# EAGLE board ScanMasterVCI (EAGLE 8.4.3)
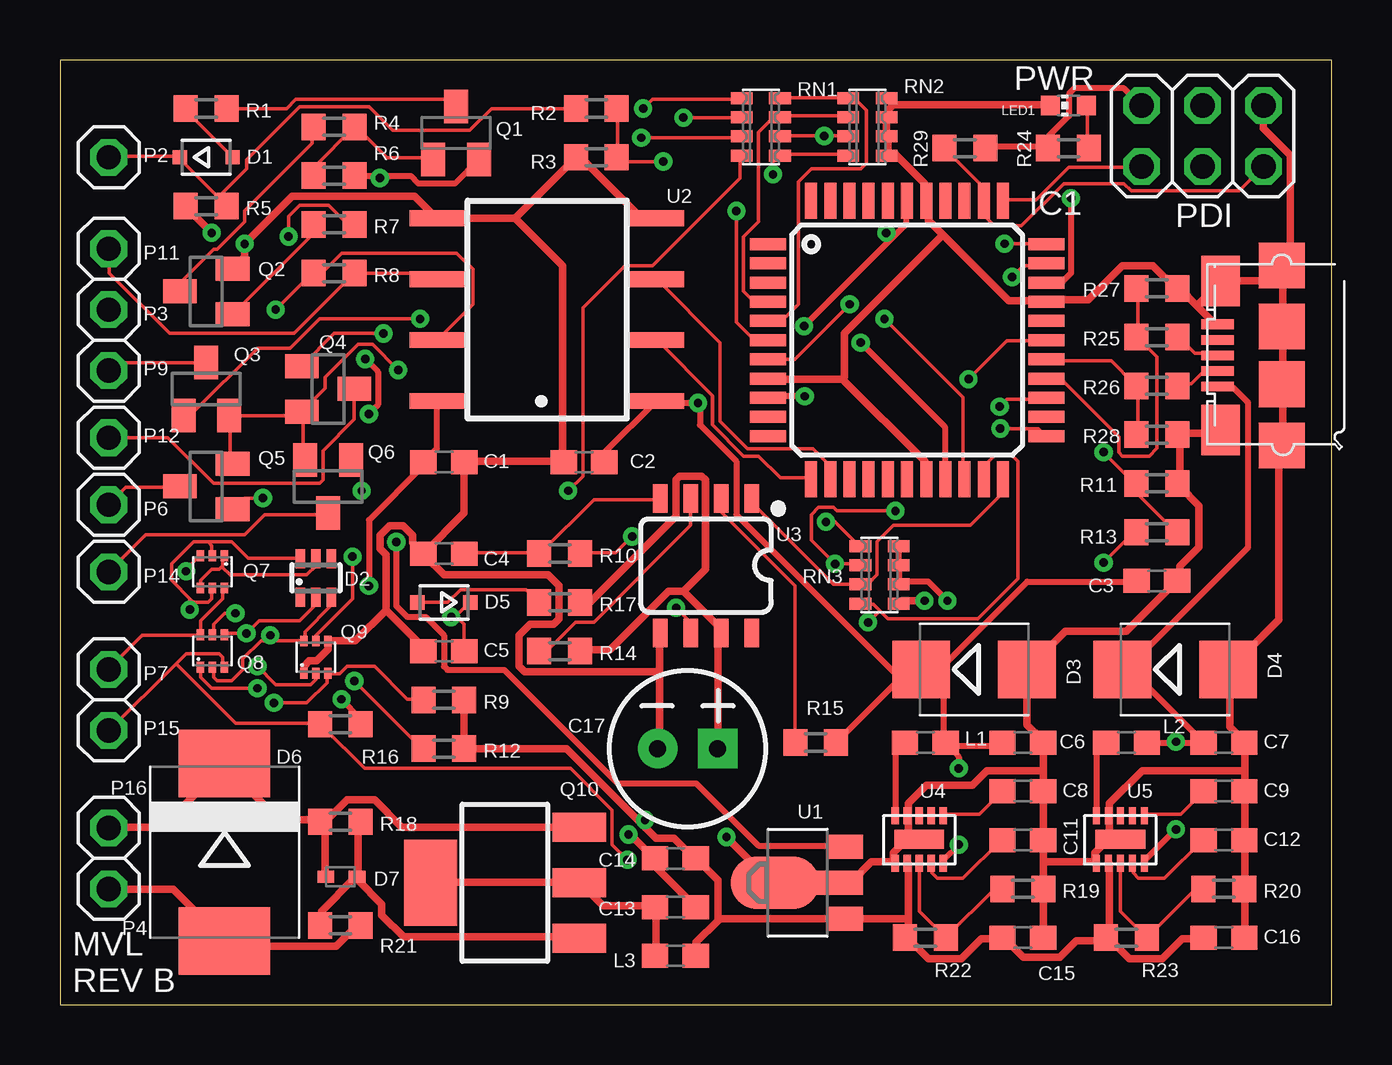
[diagram p0: board, top side]
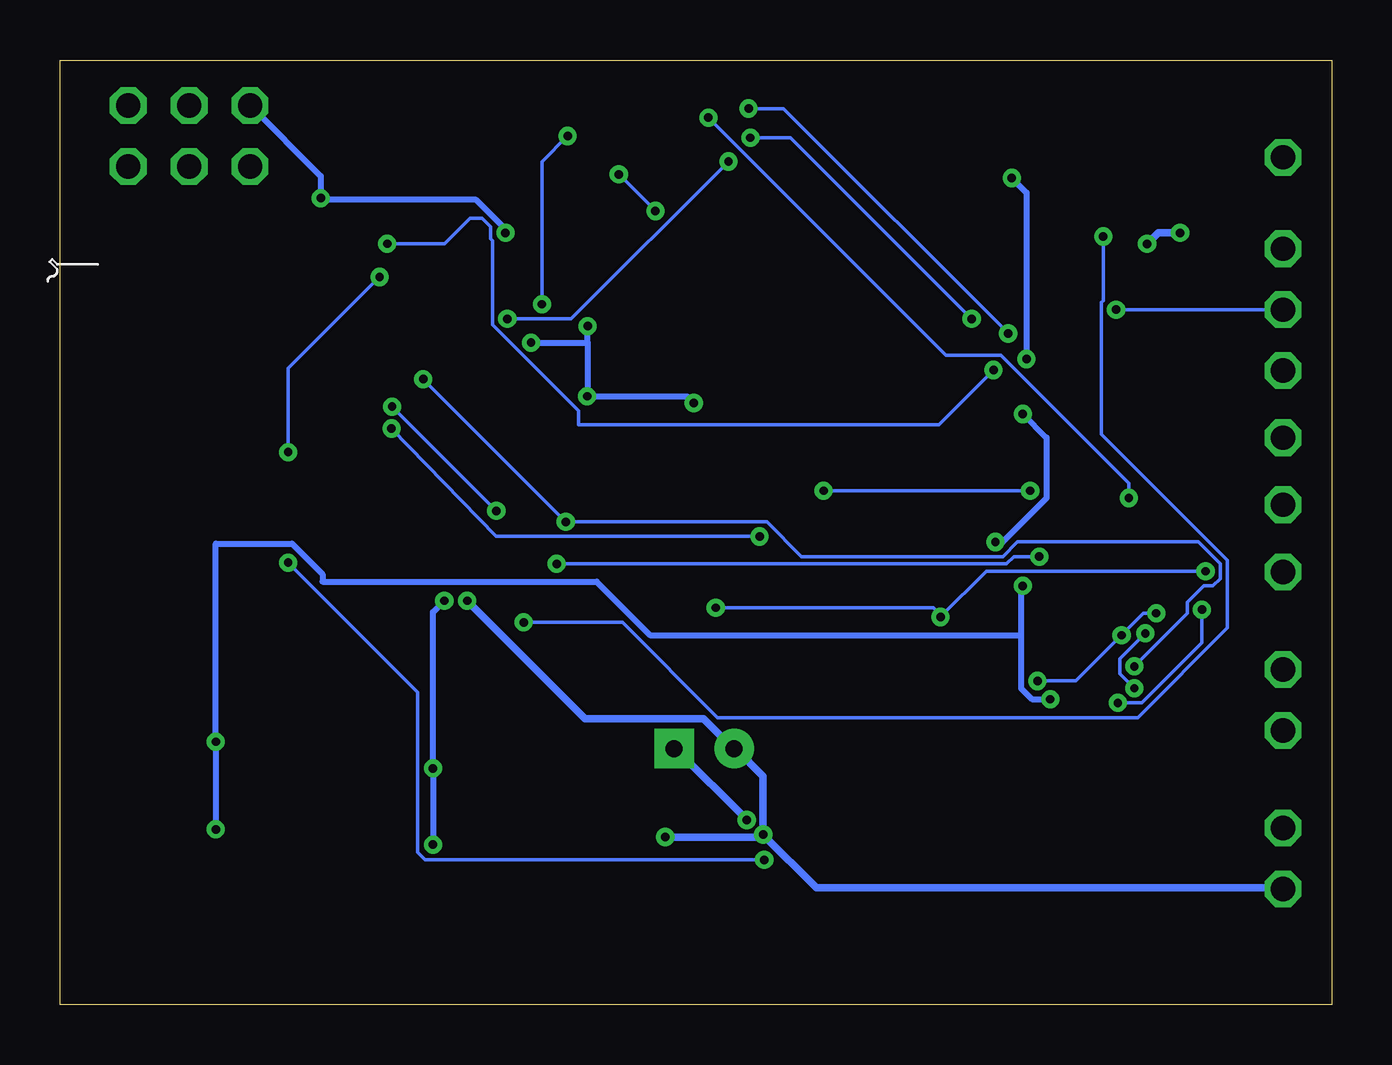
[diagram p1: board, bottom side, seen from below]

Size 53.01 x 39.36 mm. Coordinates in mm from the lower left corner, seen from the top.
Outline: 0,0 53.01,0 53.01,39.36 0,39.36 0,0
Copper layers (1*16): Top 0.035mm / dielectric 1.5mm / Bottom 0.035mm
Design rules "default": minimum track width 6mil, minimum drill 0.35mm, track to track 6mil, track to pad 6mil, pad to pad 6mil, via to via 6mil, smd to smd 6mil, copper to edge 40mil, drill to drill 6mil, minimum pad ring 10mil, minimum via ring 8mil, stop-mask expansion 4mil, vias tented up to drill 0mil, thermal gap 10mil
Net classes: 0 default: width 0.152 mm, drill 0.305 mm, clearance 0.152 mm; 1 +12v: width 0.305 mm, drill 0.305 mm, clearance 0.152 mm; 2 +3.3v: width 0.254 mm, drill 0.305 mm, clearance 0.152 mm; 3 +5v: width 0.254 mm, drill 0.305 mm, clearance 0.152 mm

## Footprints (pad centres in the part's own frame; a part is rotated, then mirrored left to right if it is on the bottom)
C0603 = smd 1.1 x 1: 1 -0.85,0; 2 0.85,0
CPOL-RADIAL-2.5MM-6.5MM = drill 0.7 pad 1.651 square: 1 1.25,0 | drill 0.7 pad 1.651: 2 -1.25,0
SOD323-R = smd 0.6 x 0.6: A 1.1,0; C -1.1,0
SOT363 = smd 0.4 x 0.8: 1 -0.65,-0.8; 2 0,-0.8; 3 0.65,-0.8; 4 0.65,0.8; 5 0,0.8; 6 -0.65,0.8
SMB = smd 2.4 x 2.4: A 2.2,0; C -2.2,0
SMC = smd 2.8 x 3.8: A 3.7,0; C -3.7,0
SOD523 = smd 0.7 x 0.5: A 0.7,0; C -0.6,0
TQFP44 = smd 1.5 x 0.5: 1 -5.8,4; 2 -5.8,3.2; 3 -5.8,2.4; 4 -5.8,1.6; 5 -5.8,0.8; 6 -5.8,0; 7 -5.8,-0.8; 8 -5.8,-1.6; 9 -5.8,-2.4; 10 -5.8,-3.2; 11 -5.8,-4; 23 5.8,-4; 24 5.8,-3.2; 25 5.8,-2.4; 26 5.8,-1.6; 27 5.8,-0.8; 28 5.8,0; 29 5.8,0.8; 30 5.8,1.6; 31 5.8,2.4; 32 5.8,3.2; 33 5.8,4 | smd 0.5 x 1.5: 12 -4,-5.8; 13 -3.2,-5.8; 14 -2.4,-5.8; 15 -1.6,-5.8; 16 -0.8,-5.8; 17 0,-5.8; 18 0.8,-5.8; 19 1.6,-5.8; 20 2.4,-5.8; 21 3.2,-5.8; 22 4,-5.8; 34 4,5.8; 35 3.2,5.8; 36 2.4,5.8; 37 1.6,5.8; 38 0.8,5.8; 39 0,5.8; 40 -0.8,5.8; 41 -1.6,5.8; 42 -2.4,5.8; 43 -3.2,5.8; 44 -4,5.8
L0603 = smd 1.1 x 1: 1 -0.85,0; 2 0.85,0
CHIP-LED0603 = smd 0.8 x 0.8: A 0,-0.75; C 0,0.75
1X01 = drill 1.016 octagon: 1 0,0
2X03 = drill 1.016 octagon: 1 -2.54,-1.27; 2 -2.54,1.27; 3 0,-1.27; 4 0,1.27; 5 2.54,-1.27; 6 2.54,1.27
SOT23-BEC = smd 1 x 1.4: B -0.95,-1.1; C 0,1.1; E 0.95,-1.1
SOT23 = smd 1 x 1.4: 1 -0.95,-1.1; 2 0.95,-1.1; 3 0,1.1
SOT563 = smd 0.3 x 0.45: 1 -0.5,-0.675; 2 0,-0.675; 3 0.5,-0.675; 4 0.5,0.675; 5 0,0.675; 6 -0.5,0.675
SOT223 = smd 1.219 x 2.235: 1 -2.311,-3.099; 2 0,-3.099; 3 2.311,-3.099 | smd 3.6 x 2.2: 4 0,3.099
R0603 = smd 1 x 1.1: 1 -0.85,0; 2 0.85,0
CTS742C083 = smd 0.5 x 0.9: 1 -1.2,-0.8; 2 -0.4,-0.8; 3 0.4,-0.8; 4 1.2,-0.8; 5 1.2,0.8; 6 0.4,0.8; 7 -0.4,0.8; 8 -1.2,0.8
SOT89 = smd 1 x 1.5: 1 -1.499,-1.981; 3 1.499,-1.981 | smd 1 x 2: 2 0,-1.727 | smd 2.2 x 3.7: 2@1 0,0.94
SOP08 = smd 0.65 x 2.35: 1 -3.81,-6.3; 2 -1.27,-6.3; 3 1.27,-6.3; 4 3.81,-6.3; 5 3.81,2.8; 6 1.27,2.8; 7 -1.27,2.8; 8 -3.81,2.8
SO08 = smd 0.6 x 1.2: 1 -1.905,-2.8; 2 -0.635,-2.8; 3 0.635,-2.8; 4 1.905,-2.8; 5 1.905,2.8; 6 0.635,2.8; 7 -0.635,2.8; 8 -1.905,2.8
TDFN-10-EP = smd 0.7 x 0.3: 1 -1.475,1; 2 -1.475,0.5; 3 -1.475,0; 4 -1.475,-0.5; 5 -1.475,-1; 6 0.505,-1; 7 0.505,-0.5; 8 0.505,0; 9 0.505,0.5; 10 0.505,1 | smd 0.8 x 2.08: EPAD -0.48,0
10118192 = smd 1.35 x 0.4: 1 2.675,1.3; 2 2.675,0.65; 3 2.675,0; 4 2.675,-0.65; 5 2.675,-1.3 | smd 1.9 x 1.9: M1 0,-3.75; M2 0,3.75; M5 0,1.2; M6 0,-1.2 | smd 1.6 x 2.1: M3 2.55,3.1; M4 2.55,-3.1

## Placement (x,y rotation side)
C1  0.1uF  [C0603]  16,22.61 0 top
C2  0.1uF  [C0603]  21.84,22.61 180 top
C3  0.1uF  [C0603]  45.72,17.65 0 top
C4  220pF  [C0603]  16,18.8 180 top
C5  220pF  [C0603]  16,14.73 180 top
C6  22uF  [C0603]  40.13,10.92 0 top
C7  22uF  [C0603]  48.51,10.92 0 top
C8  3300pF  [C0603]  40.13,8.89 0 top
C9  3300pF  [C0603]  48.51,8.89 0 top
C11  1uF  [C0603]  40.13,6.86 0 top
C12  1uF  [C0603]  48.51,6.86 0 top
C13  0.1uF 25V  [C0603]  25.65,4.06 0 top
C14  330pF 16V  [C0603]  25.65,6.1 180 top
C15  2.2uF  [C0603]  40.13,2.79 0 top
C16  2.2uF  [C0603]  48.51,2.79 0 top
C17  100uF 25V  [CPOL-RADIAL-2.5MM-6.5MM]  26.16,10.67 0 top
D1  1N4148WX  [SOD323-R]  6.1,35.31 0 top
D2  BZX84C2V4S  [SOT363]  10.67,17.78 0 top
D3  SMBJ3V3HE3  [SMB]  38.1,13.97 0 top
D4  SMAJ5.0A  [SMB]  46.48,13.97 0 top
D5  1N4148WX  [SOD323-R]  16,16.76 180 top
D6  1.5SMC43AT3G  [SMC]  6.86,6.35 270 top
D7  MM5Z10V  [SOD523]  11.68,5.33 0 top
IC1  XMEGA32A4U  [TQFP44]  35.31,27.69 0 top
L1  22uH  [L0603]  36.07,10.92 0 top
L2  15uH  [L0603]  44.45,10.92 0 top
L3  22uH  [L0603]  25.65,2.03 0 top
LED1  RED  [CHIP-LED0603]  42.04,37.47 90 top
P2  [1X01]  2.03,35.31 0 top
P3  [1X01]  2.03,28.96 0 top
P4  [1X01]  2.03,4.83 0 top
P6  [1X01]  2.03,20.83 0 top
P7  [1X01]  2.03,13.97 0 top
P9  [1X01]  2.03,26.42 0 top
P11  [1X01]  2.03,31.5 0 top
P12  [1X01]  2.03,23.62 0 top
P14  [1X01]  2.03,18.03 0 top
P15  [1X01]  2.03,11.43 0 top
P16  [1X01]  2.03,7.37 0 top
PDI  [2X03]  47.62,36.2 0 top
Q1  MMBT4403  [SOT23-BEC]  16.51,36.32 0 top
Q2  MMBT3904  [SOT23]  6.1,29.72 90 top
Q3  MMBT3904  [SOT23]  6.1,25.65 0 top
Q4  MMBT3904  [SOT23]  11.18,25.65 270 top
Q5  MMBT3904  [SOT23]  6.1,21.59 90 top
Q6  MMBT3904  [SOT23]  11.18,21.59 180 top
Q7  NTZD5110N  [SOT563]  6.35,18.03 180 top
Q8  NTZD5110N  [SOT563]  6.35,14.73 0 top
Q9  NTZD5110N  [SOT563]  10.67,14.48 0 top
Q10  ZXMP6A17G  [SOT223]  18.54,5.08 90 top
R1  47  [R0603]  6.1,37.34 180 top
R2  7.5k  [R0603]  22.35,37.34 180 top
R3  5k  [R0603]  22.35,35.31 0 top
R4  5.1k  [R0603]  11.43,36.58 0 top
R5  10k  [R0603]  6.1,33.27 0 top
R6  1k  [R0603]  11.43,34.54 0 top
R7  1k  [R0603]  11.43,32.51 180 top
R8  120  [R0603]  11.43,30.48 0 top
R9  9.09M  [R0603]  16,12.7 0 top
R10  1k  [R0603]  20.83,18.8 180 top
R11  1910  [R0603]  45.72,21.72 180 top
R12  9.09M  [R0603]  16,10.67 0 top
R13  1k  [R0603]  45.72,19.68 180 top
R14  10k  [R0603]  20.83,14.73 180 top
R15  100k  [R0603]  31.5,10.92 180 top
R16  1k  [R0603]  11.68,11.68 0 top
R17  1k  [R0603]  20.83,16.76 180 top
R18  200k  [R0603]  11.68,7.62 180 top
R19  866k  [R0603]  40.13,4.83 180 top
R20  866k  [R0603]  48.51,4.83 180 top
R21  20k  [R0603]  11.68,3.3 180 top
R22  3.32M  [R0603]  36.07,2.79 180 top
R23  3.32M  [R0603]  44.45,2.79 180 top
R24  120  [R0603]  42.04,35.69 180 top
R25  33  [R0603]  45.72,27.81 180 top
R26  33  [R0603]  45.72,25.78 180 top
R27  15k  [R0603]  45.72,29.84 0 top
R28  15k  [R0603]  45.72,23.75 0 top
R29  1k  [R0603]  37.72,35.69 0 top
RN1  742C083104JP  [CTS742C083]  29.21,36.58 270 top
RN2  742C083104JP  [CTS742C083]  33.66,36.58 270 top
RN3  742C083104JP  [CTS742C083]  34.16,17.91 270 top
U1  L78L08ABUTR  [SOT89]  30.73,5.08 90 top
U2  ISO1050  [SOP08]  18.54,28.96 90 top
U3  SN65HVDA195-Q1  [SO08]  26.92,18.29 180 top
U4  MAX17502EATB+  [TDFN-10-EP]  35.81,7.37 90 top
U5  MAX17502FATB+  [TDFN-10-EP]  44.2,7.37 90 top
U$1  MICRO_USB  [10118192]  50.93,27.05 180 top

## Library data of the parts
C1-C9 C11-C16 R1-R23 R25-R29 = adafruit
C17 = SparkFun-Capacitors; PROD_ID: CAP-08439; VALUE: 100uF
D1 D3-D7 = diode
D2 L1-L3 Q7-Q10 U1-U5 U$1 = customics
IC1 = atmel; OC_FARNELL: unknown; OC_NEWARK: unknown
LED1 = led
P2-P4 P6 P7 P9 P11 P12 P14-P16 PDI = pinhead
Q1 = transistor-pnp
Q2-Q6 = semicon-smd-ipc
R24 = resistor
RN1-RN3 = resistor-net; OC_FARNELL: unknown; OC_NEWARK: unknown

## Nets
+3V3 [+3.3v]: C2.1 C3.1 C6.1 D3.C IC1.9 IC1.19 IC1.31 IC1.39 L1.2 PDI.2 R15.1 R24.2 R29.2 RN3.6 RN3.7 RN3.8 U2.1 U4.5
+5V [+5v]: C1.1 C7.1 D4.C L2.2 R16.2 U2.8 U5.5 U$1.1
+8V [+3.3v]: Q1.E R6.2 U1.3
+12V [+12v]: C14.1 C15.1 C16.1 C17.1 L3.2 R9.2 R12.2 R14.1 R17.1 R22.2 R23.2 U1.1 U3.7 U4.2 U5.2
CCD-RX: IC1.12 U2.2
CCD-TX: IC1.13 U2.3
GND [+12v]: C1.2 C2.2 C3.2 C4.2 C5.2 C6.2 C7.2 C8.2 C9.2 C11.2 C12.2 C13.2 C14.2 C15.2 C16.2 C17.2 D3.A D4.A D6.A IC1.8 IC1.18 IC1.30 IC1.38 LED1.C P4.1 PDI.6 Q2.2 Q9.1 Q9.4 R3.1 R5.1 R11.1 R19.1 R20.1 R21.1 R27.2 R28.2 RN2.5 RN2.6 RN2.7 RN2.8 RN3.5 U1.2 U1.2@1 U2.4 U2.5 U3.5 U4.1 U4.9 U4.EPAD U5.1 U5.9 U5.EPAD U$1.5 U$1.M1 U$1.M2 U$1.M3 U$1.M4 U$1.M5 U$1.M6
ISO-K: C5.1 D5.C Q7.3 U3.6
ISO-K-EN: IC1.25 Q9.5 RN3.2
ISO-K-RX: IC1.22 RN3.3 U3.1
ISO-K-TX: IC1.23 R10.1
J1850VPW-RX: IC1.20 R2.1 R3.2
J1850VPW-TX: IC1.21 R7.1 RN3.4
J1962-2: D1.C P2.1 R2.2 R5.2
J1962-3: P3.1 R8.1 U2.7
J1962-6: P6.1 Q5.3
J1962-7: P7.1 Q7.6 Q8.6
J1962-9: P9.1 Q3.3
J1962-11: P11.1 R8.2 U2.6
J1962-12: P12.1 Q4.3
J1962-14: P14.1 Q6.3
J1962-15: P15.1 Q8.3 R13.2 R16.1
J1962-16 [+12v]: D6.C D7.C P16.1 Q10.3 R18.2
N$1: D2.2 Q8.1 Q8.4
N$2: LED1.A R24.1
N$3: C8.1 U4.6
N$4: D2.5 Q7.1 Q7.4
N$5: D2.3 Q8.2 Q8.5 Q9.6 R12.1
N$6: Q2.1 R7.2
N$7: R19.2 R22.1 U4.3
N$8: R15.2 U3.2
N$9: C11.1 U4.4
N$10: C4.1 R10.2 U3.4
N$11: D2.6 Q7.2 Q7.5 Q9.3 R9.1
N$12 [+3.3v]: L1.1 U4.10
N$13: Q4.1 RN1.1
N$14: R14.2 U3.3
N$15: C12.1 U5.4
N$16: R20.2 R23.1 U5.3
N$17: C9.1 U5.6
N$18 [+12v]: C13.1 L3.1 Q10.2 Q10.4
N$19 [+5v]: L2.1 U5.10
N$20 [+12v]: D7.A Q10.1 R18.1 R21.2
N$21: Q5.1 RN1.2
N$22: Q3.1 RN1.3
N$23: Q6.1 RN1.4
N$24: R25.1 U$1.3
N$25: R26.1 U$1.2
N$26: Q2.3 R4.1
N$28: Q1.B R4.2 R6.1
N$29: Q1.C R1.1
N$30: D1.A R1.2
N$31: D5.A R17.2
PDI_CLK: IC1.35 PDI.5 R29.1
PDI_DATA: IC1.34 PDI.1
SCI-A-ENGINE-EN: IC1.4 RN1.7 RN2.2
SCI-A-TRANS-EN: IC1.6 RN1.5 RN2.4
SCI-A-TX-EN: IC1.28 Q9.2 RN3.1
SCI-B-ENGINE-EN: IC1.5 RN1.8 RN2.1
SCI-B-TRANS-EN: IC1.7 RN1.6 RN2.3
SCI-RX: IC1.32 R11.2 R13.1
SCI-TX: IC1.33 Q3.2 Q4.2 Q5.2 Q6.2
USB_D+: IC1.26 R25.2 R27.1
USB_D-: IC1.27 R26.2 R28.1

## Tracks (layer width: path | path; a pad name or v marks a point on that pad's centre or on a via)
+3V3  (via drill 0.35)
  Top 0.254: C2.1 22.71,22.63 22.71,23.01 U2.1 24.92,25.07 v26.59,25.07 26.67,24.99 26.67,24.16 28.19,22.63 28.19,20.42 35.2,13.41 D3.C | v42.14,33.6 42.14,30.48 41.76,30.1 41.15,30.1 IC1.31 | RN3.8 34.98,19.05 34.98,18.36 RN3.7 34.98,18.29 34.98,17.53 RN3.6 35.08,17.62 36.2,17.62 v36.99,16.83 | 29.49,25.22 IC1.9 29.57,25.35 v31.04,25.35 | v33.38,27.58 36.88,24.08 36.88,21.95 IC1.19 | v31.01,28.27 34.67,31.93 | 34.67,31.93 35.28,32.54 35.28,33.45 IC1.39 | 34.67,31.93 v34.44,32.16 | R29.2 38.63,35.74 41.15,35.74 R24.2 41.22,35.81 41.22,36.2 42.06,37.03 42.06,37.95 42.29,38.18 44.35,38.18 45.03,37.49 PDI.2 | v37.47,6.67 36.83,6.03 U4.5 | v37.47,9.84 37.47,10.32 36.99,10.79 L1.2 | C6.1 39.21,10.79 37.15,10.79 L1.2 | R15.1 32.38,10.95 35.08,13.65 D3.C | D3.C 36.67,13.97 40.32,17.62 44.77,17.62 C3.1 | L1.2 36.83,10.95 36.83,13.97 D3.C
  Bottom 0.254: PDI.2 42.14,34.52 v42.14,33.6 42.06,33.53 35.66,33.53 34.44,32.31 v34.44,32.16 | 26.75,25.22 v26.59,25.07 26.87,25.35 v31.04,25.35 30.99,25.22 31.01,25.25 31.01,27.58 | v33.38,27.58 31.01,27.58 | 31.01,27.58 v31.01,28.27 | v37.47,6.67 v37.47,9.84 37.47,16.35 v36.99,16.83
+5V  (via drill 0.35)
  Top 0.254: v11.73,12.72 12.5,11.96 12.5,11.73 R16.2 | v12.88,17.45 12.88,20.19 15.16,22.48 C1.1 15.24,22.7 15.72,23.18 15.72,25.08 U2.8 | L2.2 46.51,10.92 | 46.51,10.92 47.6,10.92 47.62,10.9 C7.1 47.62,10.95 44.61,13.97 D4.C 44.45,13.97 49.53,19.05 49.53,25.08 48.9,25.72 48.26,25.72 U$1.1 | v46.51,7.3 45.24,6.03 U5.5 | v46.51,10.95 46.51,10.92
  Bottom 0.254: v11.73,12.72 12.5,12.72 12.95,13.18 12.95,15.4 | 12.95,15.4 12.95,17.37 v12.88,17.45 | v46.51,7.3 v46.51,10.95 46.51,19.21 43.34,19.21 42.07,17.94 42.07,17.62 30.64,17.62 28.42,15.4 12.95,15.4
+8V  (via drill 0.35)
  Top 0.254: 13.34,34.52 14.63,34.52 14.94,34.21 16.46,34.21 17.45,35.2 Q1.E | 13.34,34.52 12.34,34.52 R6.2 | v14.02,19.28 14.02,16.61 14.48,16.15 15.24,16.15 16,15.39 16,14.1 16.15,13.95 18.52,13.95 23.24,9.22 26.52,9.22 29.11,6.63 32.69,6.63 U1.3 | v12.88,24.61 13.26,24.99 13.26,26.36 v12.72,26.9 | v13.34,34.44 13.34,34.52
  Bottom 0.254: v14.02,19.28 13.72,19.28 11.89,21.11 11.89,23.62 v12.88,24.61 | v12.72,26.9 12.72,33.83 v13.34,34.44
+12V  (via drill 0.35)
  Top 0.305: 25.98,17.22 25.38,17.22 22.94,14.78 21.72,14.78 R14.1 | 25.98,17.22 27.51,15.7 27.51,15.54 U3.7 27.43,15.47 27.43,10.67 C17.1 | R17.1 22.1,16.76 25.68,20.34 25.68,21.87 25.83,22.02 26.75,22.02 26.9,21.87 26.9,18.14 25.98,17.22 | U5.2 43.74,5.87 43.74,2.9 43.66,2.82 R23.2 | C16.1 47.62,2.74 46.79,2.74 45.95,1.91 44.58,1.91 43.74,2.74 R23.2 | 35.36,3.58 35.36,2.9 35.28,2.82 R22.2 35.36,2.74 36.2,1.91 37.57,1.91 38.41,2.74 39.24,2.74 C15.1 39.4,2.74 40.16,1.98 41.68,1.98 42.37,2.67 43.51,2.67 R23.2 | 35.36,3.58 35.36,5.87 U4.2 | 35.36,3.58 32.77,3.58 U1.1 32.61,3.58 27.51,3.58 27.43,3.5 | R9.2 16.84,12.65 R12.2 21.11,10.67 24.23,7.54 | 27.43,3.5 26.52,2.59 26.52,2.06 L3.2 | 27.43,3.5 27.43,5.18 26.52,6.1 C14.1 26.36,6.17 25.6,6.93 24.84,6.93 24.23,7.54 | v24.38,7.7 24.23,7.54
  Bottom 0.305: v24.38,7.7 27.36,10.67 C17.1
CCD-RX
  Top 0.152: IC1.12 31.24,21.95 30.02,21.95 29.11,22.86 28.5,22.86 27.2,24.16 27.2,25.38 24.92,27.66 U2.2
CCD-TX
  Top 0.152: IC1.13 32.08,21.95 32.08,22.48 31.39,23.16 28.65,23.16 27.51,24.31 27.51,27.58 24.92,30.18 U2.3
GND  (via drill 0.35)
  Top 0.305: C16.2 49.38,2.82 49.38,4.8 R20.1 49.38,4.95 49.38,6.86 C12.2 49.38,6.93 49.38,8.84 C9.2 49.38,8.99 49.38,9.75 | 49.38,9.75 49.38,10.9 C7.2 49.3,11.05 48.77,11.58 48.77,13.87 D4.A 48.74,13.97 50.8,16.03 50.8,23.18 U$1.M2 50.96,23.34 50.96,25.72 U$1.M5 50.96,25.88 50.96,28.1 U$1.M6 50.96,28.26 50.96,30.16 | 34.75,5.94 34.75,6.33 35.28,6.86 35.81,6.86 U4.EPAD 35.36,6.93 35.36,7.85 U4.9 35.36,8 35.36,8.38 36.12,9.14 38.02,9.14 38.63,9.75 41,9.75 | 34.75,5.94 U4.1 | 34.75,5.94 33.83,5.94 32.99,5.11 32.61,5.11 U1.2 32.38,5.11 29.79,5.11 U1.2@1 29.69,5.08 v27.78,6.99 | 43.13,5.94 43.13,6.33 43.66,6.86 44.2,6.86 U5.EPAD 43.74,6.93 43.74,7.85 U5.9 43.74,8 43.74,8.38 45.11,9.75 49.38,9.75 | 43.13,5.94 U5.1 | C15.2 41,2.82 41,4.8 R19.1 41,4.95 41,5.94 | 41,5.94 41,6.86 C11.2 41,6.93 41,8.84 C8.2 41,8.99 41,9.75 | 41,9.75 41,10.9 C6.2 40.92,11.05 40.31,11.66 40.31,13.95 D3.A 40.32,13.97 41.91,15.56 44.45,15.56 46.51,17.62 C3.2 46.67,17.78 46.67,18.26 47.47,19.05 47.47,20.8 46.67,21.59 R11.1 46.67,21.75 46.67,23.65 R28.2 46.67,23.81 48.26,23.81 U$1.M3 | 41,5.94 43.13,5.94 | U2.4 24.23,32.77 21.72,35.28 21.57,35.28 R3.1 21.41,35.2 18.97,32.77 | 18.97,32.77 U2.5 15.62,32.84 14.78,33.68 9.68,33.68 v7.7,31.7 7.7,31.17 7.24,30.71 Q2.2 | 18.97,32.77 20.95,30.79 20.95,22.78 C2.2 20.95,22.63 16.99,22.63 C1.2 16.85,20.5 C4.2 | R21.1 12.5,3.28 12.34,3.28 11.51,2.44 7.01,2.44 6.86,2.59 D6.A 6.78,2.74 4.72,4.8 2.06,4.8 P4.1 | C13.2 26.44,4.12 24.84,5.71 24.84,6.1 C14.2 24.69,6.17 23.77,7.09 v23.7,7.09 | 24.99,13.87 24.99,10.74 C17.2 | 24.99,13.87 24.99,15.47 U3.5
  Top 0.305: 36.8,32.08 36.2,32.69 36.2,33.38 IC1.38 36.04,33.6 36.04,34.21 34.82,35.43 34.67,35.43 RN2.5 34.52,35.43 34.52,36.12 RN2.6 34.44,36.27 34.44,36.88 RN2.7 34.52,37.03 34.52,37.26 34.75,37.49 | 36.8,32.08 39.55,29.34 41.07,29.34 IC1.30 41.12,29.37 42.86,29.37 44.29,30.8 45.56,30.8 46.51,29.84 R27.2 46.67,29.84 47.39,29.13 | 32.61,26.06 29.57,26.06 IC1.8 | 32.61,26.06 36.04,22.63 36.04,21.95 IC1.18 | 36.8,32.08 32.69,27.96 32.69,26.14 32.61,26.06 | v6.33,32.16 5.26,33.22 R5.1 | 24.99,13.87 19.36,13.87 19.13,14.1 19.13,15.39 19.58,15.85 20.57,15.85 20.8,16.08 20.8,17.45 20.34,17.91 16,17.91 15.24,18.67 C4.2 | 34.75,37.49 41.22,37.49 LED1.C | 34.75,37.49 34.52,37.72 RN2.8 | 13.59,16.43 13.59,18.74 13.34,19 13.34,19.56 13.74,19.96 14.3,19.96 14.7,19.56 14.7,19.24 C4.2 | C5.2 15.15,14.87 13.59,16.43 | 13.59,16.43 12.31,15.15 Q9.4 11.17,14.8 10.7,14.33 10.39,14.33 10.17,14.11 Q9.1 | 47.39,29.13 48.1,28.42 U$1.5 | 47.39,29.13 48.26,30 U$1.M4 48.42,30.16 50.96,30.16 | 50.96,30.16 50.96,30.8 U$1.M1 | 50.96,30.16 U$1.M1 | PDI.6 50.16,36.51 51.28,35.4 51.28,31.27 50.96,30.96 U$1.M1 | v36.04,16.83 35.08,16.83 RN3.5
  Bottom 0.305: v6.33,32.16 7.24,32.16 v7.7,31.7 | v23.7,7.09 23.7,9.53 24.84,10.67 C17.2 24.92,10.64 26.19,11.91 31.11,11.91 v36.04,16.83 | v23.7,7.09 21.49,4.88 2.06,4.88 P4.1 | v27.78,6.99 23.81,6.99 v23.7,7.09
ISO-K  (via drill 0.35)
  Top 0.152: v5.26,18.06 5.26,18.14 5.79,18.67 Q7.3 | D5.C 17.07,16.76 16.46,16.15 v16.31,16.15 16.54,16.15 16.84,15.85 16.84,14.78 C5.1 | U3.6 26.29,15.93 v25.68,16.54
  Bottom 0.152: v5.26,18.06 14.4,18.06 v16.31,16.15 16.31,16.23 16.61,16.54 v25.68,16.54
ISO-K-EN  (via drill 0.35)
  Top 0.152: Q9.5 10.67,15.39 12.19,16.92 v12.19,18.67 | RN3.2 33.3,18.36 v32.31,18.36 31.32,19.36 31.32,20.42 31.62,20.73 32.23,20.73 32.38,20.57 v34.82,20.57 | v39.17,24.92 39.47,25.22 41.07,25.22 IC1.25
  Bottom 0.152: v12.19,18.67 13.26,18.67 13.56,18.36 v32.31,18.36 | v34.82,20.57 v39.17,24.92
ISO-K-RX
  Top 0.152: U3.1 28.88,21.03 28.88,20.88 32.23,17.53 33.3,17.53 RN3.3 33.38,17.53 33.68,17.53 34.06,17.91 34.06,19.28 34.75,19.96 37.95,19.96 39.24,21.26 39.24,21.87 IC1.22
ISO-K-TX  (via drill 0.35)
  Top 0.152: v23.85,19.51 23.16,18.82 21.72,18.82 R10.1 | 41.07,23.62 IC1.23 40.79,24 v39.19,24
  Bottom 0.152: v23.85,19.51 34.82,19.51 v39.19,24
J1850VPW-RX  (via drill 0.35)
  Top 0.152: R2.1 23.24,37.34 23.24,35.36 R3.2 23.32,35.36 23.55,35.13 v25.15,35.13 | v34.37,28.57 37.64,25.3 37.64,21.95 IC1.20
  Bottom 0.152: v34.37,28.57 31.7,28.57 v25.15,35.13
J1850VPW-TX  (via drill 0.35)
  Top 0.152: 34.18,16.42 34.52,16.08 38.25,16.08 39.93,17.75 39.93,22.63 39.62,22.94 39.01,22.94 38.56,22.48 38.56,21.95 IC1.21 | 34.18,16.42 33.91,16.69 33.38,16.69 RN3.4 | v9.53,32 9.53,32.84 9.98,33.3 11.2,33.3 11.96,32.54 12.27,32.54 R7.1 | 34.18,16.42 v33.68,15.93
  Bottom 0.152: v9.53,32 9.53,29.34 9.6,29.26 9.6,23.77 4.34,18.52 4.34,15.7 8.08,11.96 25.6,11.96 29.57,15.93 v33.68,15.93
J1962-2
  Top 0.152: P2.1 2.06,35.36 4.95,35.36 D1.C 4.95,35.28 6.93,33.3 R5.2 6.63,33.68 7.77,34.82 7.77,35.2 9.98,37.41 12.88,37.41 13.87,36.42 17.07,36.42 17.98,37.34 R2.2
J1962-3  (via drill 0.35)
  Top 0.152: U2.7 15.77,27.74 17.22,29.18 17.22,30.63 16.54,31.32 11.73,31.32 10.9,30.48 R8.1 10.52,30.48 v8.99,28.96
  Bottom 0.152: v8.99,28.96 P3.1
J1962-6
  Top 0.152: Q5.3 4.95,21.57 2.74,21.57 2.06,20.88 P6.1
J1962-7
  Top 0.152: Q7.6 6.78,17.3 6.78,16.92 5.87,16 5.87,15.47 Q8.6 5.79,15.39 3.43,15.39 2.06,14.02 P7.1
J1962-9
  Top 0.152: P9.1 2.36,26.75 Q3.3
J1962-11
  Top 0.152: U2.6 15.7,30.25 15.47,30.48 R8.2 12.27,30.48 9.75,27.96 4.57,27.96 2.06,30.48 2.06,31.47 P11.1
J1962-12
  Top 0.152: P12.1 4.5,23.62 6.4,21.72 10.82,21.72 10.97,21.87 10.97,23.09 12.27,24.38 12.27,25.6 Q4.3
J1962-14
  Top 0.152: P14.1 3.58,19.58 7.7,19.58 8.53,20.42 11.12,20.42 Q6.3
J1962-15  (via drill 0.35)
  Top 0.152: 4.84,14.21 2.06,11.43 P15.1 | 4.84,14.21 5.26,14.63 6.63,14.63 6.78,14.48 6.78,14.1 Q8.3 | 4.84,14.21 7.32,11.73 10.82,11.73 R16.1 10.95,11.59 12.7,9.84 21.27,9.84 23.02,8.1 23.02,6.67 v23.65,6.03 | v43.5,18.41 44.77,19.68 R13.2
  Bottom 0.152: v43.5,18.41 38.1,13.02 38.1,6.35 37.78,6.03 v23.65,6.03
J1962-16
  Top 0.305: D7.C 11.05,5.33 11.05,7.47 10.9,7.62 R18.2 | R18.2 10.74,7.7 9.14,7.7 6.86,9.98 D6.C 6.78,9.91 4.27,7.39 2.06,7.39 P16.1 | Q10.3 14.25,7.39 13.11,8.53 11.96,8.53 11.05,7.62 R18.2 | Q10.3
N$1  (via drill 0.35)
  Top 0.152: v8.23,13.18 6.33,13.18 5.87,13.64 5.87,14.02 Q8.1 | Q8.4 6.86,15.47 v7.77,15.47 8.31,16 9.98,16 10.67,16.69 D2.2
  Bottom 0.152: v8.23,13.18 8.84,13.79 8.84,14.4 v7.77,15.47
N$2
  Top 0.152: LED1.A 42.82,37.41 42.82,35.74 R24.1
N$3
  Top 0.152: U4.6 36.88,7.92 38.33,7.92 39.24,8.84 C8.1
N$4
  Top 0.152: 6.74,18.25 6.78,18.29 6.78,18.67 Q7.1 | 6.74,18.25 6.63,18.14 6.33,18.14 5.87,17.68 5.87,17.37 Q7.4 | D2.5 10.67,18.29 10.29,17.91 7.09,17.91 6.74,18.25
N$5  (via drill 0.35)
  Top 0.152: 8.76,15.16 10.13,15.16 Q9.6 10.21,15.24 10.21,15.54 11.28,16.61 11.28,16.92 D2.3 | 8.76,15.16 8.38,15.16 7.62,14.4 7.62,13.95 7.16,13.49 6.55,13.49 6.4,13.64 6.4,14.02 Q8.2 | v7.32,16.31 6.86,16.31 6.4,15.85 6.4,15.47 Q8.5 | 8.76,15.16 v8.76,15.39 | v12.27,13.49 15.09,10.67 R12.1
  Bottom 0.152: v7.32,16.31 7.85,16.31 v8.76,15.39 10.67,13.49 v12.27,13.49
N$6
  Top 0.152: R7.2 10.52,32.46 10.52,32.08 7.24,28.8 Q2.1
N$7
  Top 0.152: U4.3 35.81,3.89 36.88,2.82 R22.1 36.96,2.82 38.94,4.8 39.24,4.8 R19.2
N$8
  Top 0.152: R15.2 30.63,10.97 30.63,17.45 27.58,20.5 27.58,21.03 U3.2
N$9
  Top 0.152: U4.4 36.35,5.87 36.35,5.49 36.58,5.26 37.64,5.26 39.24,6.86 C11.1
N$10
  Top 0.152: C4.1 16.92,18.82 19.96,18.82 R10.2 20.04,18.82 22.25,21.03 24.99,21.03 U3.4
N$11  (via drill 0.35)
  Top 0.152: R9.1 15.09,12.72 14.48,12.72 13.11,14.1 11.96,14.1 11.66,13.79 11.2,13.79 Q9.3 11.12,13.72 11.12,13.41 10.29,12.57 v8.91,12.57 | 5.45,16.88 4.65,17.68 4.65,18.36 5.56,19.28 6.17,19.28 6.21,19.24 | 5.45,16.88 5.56,16.76 6.17,16.76 6.33,16.92 6.33,17.3 Q7.5 | 6.21,19.24 6.33,19.13 6.33,18.75 Q7.2 | D2.6 9.98,18.59 7.85,18.59 7.16,19.28 6.25,19.28 6.21,19.24 | v5.41,16.46 5.41,16.84 5.45,16.88
  Bottom 0.152: v8.91,12.57 7.92,12.57 5.41,15.09 v5.41,16.46
N$12
  Top 0.254: U4.10 34.82,7.92 34.82,10.52 35.2,10.9 L1.1
N$13  (via drill 0.35)
  Top 0.152: v24.31,37.34 24.69,37.72 28.35,37.72 RN1.1 | v13.49,27.96 11.43,27.96 10.13,26.67 Q4.1
  Bottom 0.152: v24.31,37.34 22.86,37.34 v13.49,27.96
N$14
  Top 0.152: U3.3 26.29,19.96 22.25,15.93 21.49,15.93 20.34,14.78 20.04,14.78 R14.2
N$15
  Top 0.152: U5.4 44.73,5.87 44.73,5.49 44.96,5.26 46.02,5.26 47.62,6.86 C12.1
N$16
  Top 0.152: U5.3 44.2,3.89 45.26,2.82 R23.1 45.34,2.82 47.32,4.8 47.62,4.8 R20.2
N$17
  Top 0.152: U5.6 45.26,7.92 46.71,7.92 47.62,8.84 C9.1
N$18
  Top 0.305: L3.1 24.84,2.06 24.84,4.04 C13.1 24.69,4.12 22.63,4.12 21.72,5.03 Q10.2 21.49,5.11 15.47,5.11 Q10.4
N$19
  Top 0.254: U5.10 43.2,7.92 43.2,10.52 43.59,10.9 L2.1
N$20
  Top 0.305: D7.A 12.42,5.33 12.42,7.54 12.5,7.62 R18.1 | R21.2 10.9,3.35 10.9,3.89 12.27,5.26 D7.A | Q10.1 21.64,2.82 14.33,2.82 13.41,3.73 13.41,4.19 12.42,5.18 D7.A
N$21  (via drill 0.35)
  Top 0.152: v25.98,36.96 28.35,36.96 RN1.2 | v8.46,21.11 7.7,21.11 7.24,20.65 Q5.1
  Bottom 0.152: v25.98,36.96 16.08,27.05 13.79,27.05 8.46,21.72 v8.46,21.11
N$22  (via drill 0.35)
  Top 0.152: v24.23,36.12 28.35,36.12 RN1.3 | v15.01,28.57 10.82,28.57 9.6,27.36 8.23,27.36 5.49,24.61 5.18,24.61 Q3.1
  Bottom 0.152: v24.23,36.12 22.55,36.12 v15.01,28.57
N$23  (via drill 0.35)
  Top 0.152: v21.18,21.41 21.79,22.02 21.79,29.03 23.55,30.79 24.69,30.79 28.35,34.44 28.35,35.36 RN1.4 | v12.57,21.41 12.57,22.25 12.19,22.63 Q6.1
  Bottom 0.152: v12.57,21.41 v21.18,21.41
N$24
  Top 0.152: R25.1 46.67,27.78 47.31,27.15 48.1,27.15 U$1.3
N$25
  Top 0.152: R26.1 46.67,25.88 47.15,25.88 47.62,26.35 48.1,26.35 U$1.2
N$26
  Top 0.152: R4.1 10.52,36.58 10.52,35.89 7.7,33.07 7.7,32.61 6.55,31.47 6.4,31.47 5.03,30.1 5.03,29.72 Q2.3
N$28
  Top 0.152: R6.1 10.59,34.59 10.59,34.9 12.27,36.58 R4.2 12.34,36.58 13.64,35.28 15.54,35.28 Q1.B
N$29
  Top 0.152: R1.1 9.45,37.34 9.83,37.72 16.23,37.72 16.46,37.49 Q1.C
N$30
  Top 0.152: D1.A 7.16,35.36 5.18,37.34 R1.2
N$31
  Top 0.152: D5.A 16.15,16.76 16.69,17.3 19.43,17.3 19.96,16.76 R17.2
PDI_CLK
  Top 0.152: PDI.5 49.15,33.91 44.65,33.91 44.35,34.21 41.83,34.21 40.08,32.46 38.94,32.46 38.56,32.84 38.56,33.45 IC1.35 38.48,33.53 38.48,34.06 36.88,35.66 R29.1
PDI_DATA
  Top 0.152: IC1.34 39.32,33.53 40.69,33.53 42.06,34.9 45.03,34.9 PDI.1
SCI-A-ENGINE-EN
  Top 0.152: IC1.4 29.49,29.34 28.88,29.34 28.5,29.72 28.5,32 29.11,32.61 29.11,36.35 29.72,36.96 29.95,36.96 RN1.7 30.02,37.03 32.84,37.03 RN2.2
SCI-A-TRANS-EN  (via drill 0.35)
  Top 0.152: RN2.4 32.84,35.43 30.02,35.43 RN1.5 29.95,35.36 29.72,35.13 v29.72,34.59 | v28.19,33.07 28.19,28.42 28.88,27.74 29.49,27.74 IC1.6
  Bottom 0.152: v29.72,34.59 v28.19,33.07
SCI-A-TX-EN  (via drill 0.35)
  Top 0.152: Q9.2 10.67,13.56 10.44,13.34 8.99,13.34 v8.23,14.1 | v31.93,20.12 32.31,20.12 33.3,19.13 RN3.1 | v37.87,26.06 39.47,27.66 41.07,27.66 IC1.28
  Bottom 0.152: v8.23,14.1 6.02,16.31 6.02,16.76 5.33,17.45 4.95,17.45 4.65,17.75 4.65,18.36 5.56,19.28 13.11,19.28 13.72,18.67 22.1,18.67 23.55,20.12 v31.93,20.12 v37.87,26.06
SCI-B-ENGINE-EN
  Top 0.152: RN1.8 30.02,37.8 32.84,37.8 RN2.1 32.92,37.72 33.15,37.72 33.6,37.26 33.6,35.05 33.38,34.82 31.32,34.82 30.79,34.29 30.79,29.18 30.1,28.5 29.57,28.5 IC1.5
SCI-B-TRANS-EN  (via drill 0.35)
  Top 0.152: RN1.6 30.02,36.2 v31.85,36.2 32.84,36.2 RN2.3 | v32.92,29.18 30.63,26.9 29.57,26.9 IC1.7
  Bottom 0.152: v32.92,29.18 32.92,35.13 v31.85,36.2
SCI-RX  (via drill 0.35)
  Top 0.152: 41.68,30.86 41.15,30.86 IC1.32 40.96,30.8 40.16,30.8 v39.69,30.32 | R13.1 46.51,19.68 44.93,21.27 44.93,21.59 R11.2 44.77,21.75 v43.5,23.02
  Bottom 0.152: v39.69,30.32 43.5,26.51 v43.5,23.02
SCI-TX  (via drill 0.35)
  Top 0.152: Q5.2 7.16,22.55 7.09,22.63 7.09,24.54 Q3.2 7.16,24.54 10.13,24.54 | 10.13,24.54 10.13,22.78 10.21,22.71 Q6.2 | 10.13,24.54 10.13,24.69 Q4.2 | v14.1,26.44 13.03,27.51 12.42,27.51 11.05,26.14 11.05,25.68 10.13,24.77 Q4.2 | 41.15,31.62 IC1.33 41.09,31.7 v39.37,31.7 | 10.13,24.54 Q4.2
  Bottom 0.152: v14.1,26.44 16.38,24.16 31.39,24.16 31.39,24.75 34.97,28.32 34.97,31.82 35.05,31.91 35.05,32.41 35.41,32.76 35.91,32.76 36.97,31.7 v39.37,31.7
USB_D+
  Top 0.152: R27.1 44.93,29.84 44.93,27.94 R25.2 44.93,27.78 45.72,26.99 45.72,23.18 45.4,22.86 44.29,22.86 44.13,23.02 44.13,23.65 41.75,26.04 41.12,26.04 IC1.26
USB_D-
  Top 0.152: R28.1 44.93,23.81 44.93,25.72 R26.2 44.77,25.88 43.81,26.83 41.12,26.83 IC1.27

## Text on the board
tPlace: MVL / REV B
tNames: PWR